# Altium PCB canDrive_hw_board2_v2.PcbDoc
Units mm, origin at the board's own origin, x right, y up, seen from the top; angles counter-clockwise.
Board outline 42.4 x 20.43 mm, 2 copper layers (Top Layer, Bottom Layer), stack 1.571 mm thick; 19 components, 24 nets, 97 pads, 33 vias.
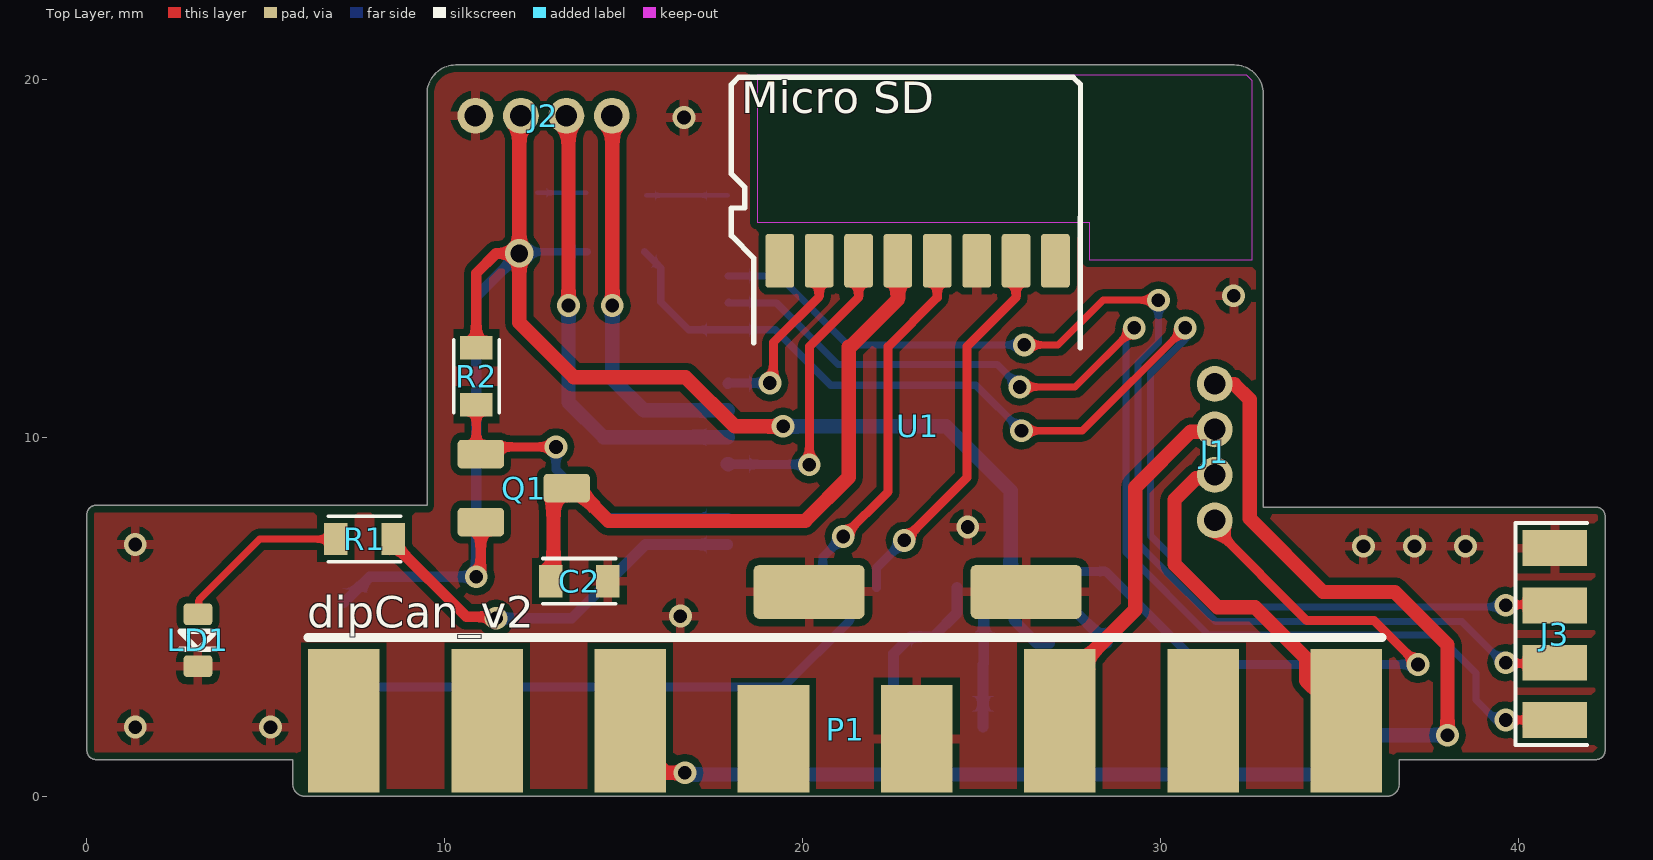
[diagram p0: Top Layer view]
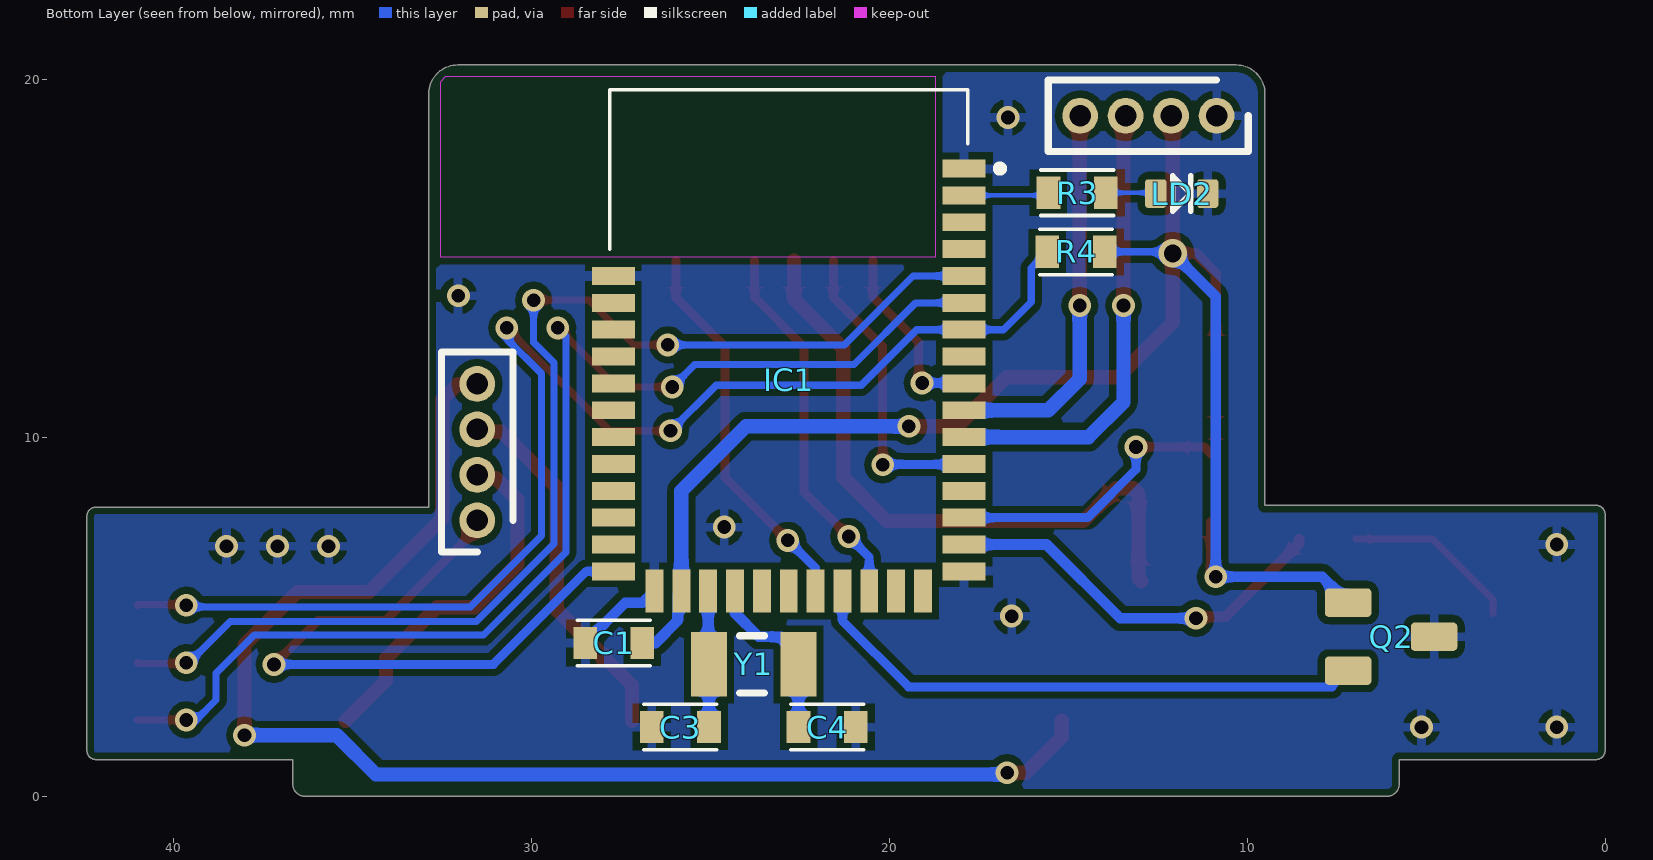
[diagram p1: Bottom Layer view, seen from below]
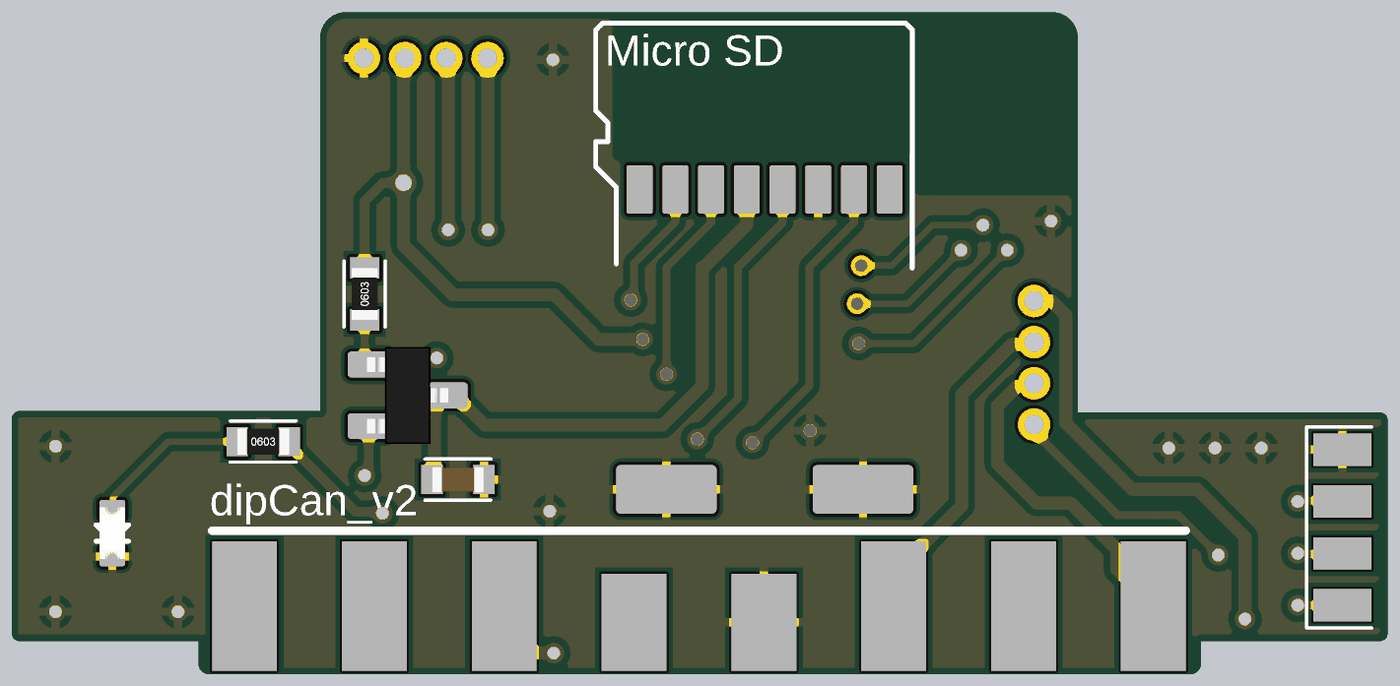
[diagram p2: 3D render of the assembled board from above, using the file's embedded part models]
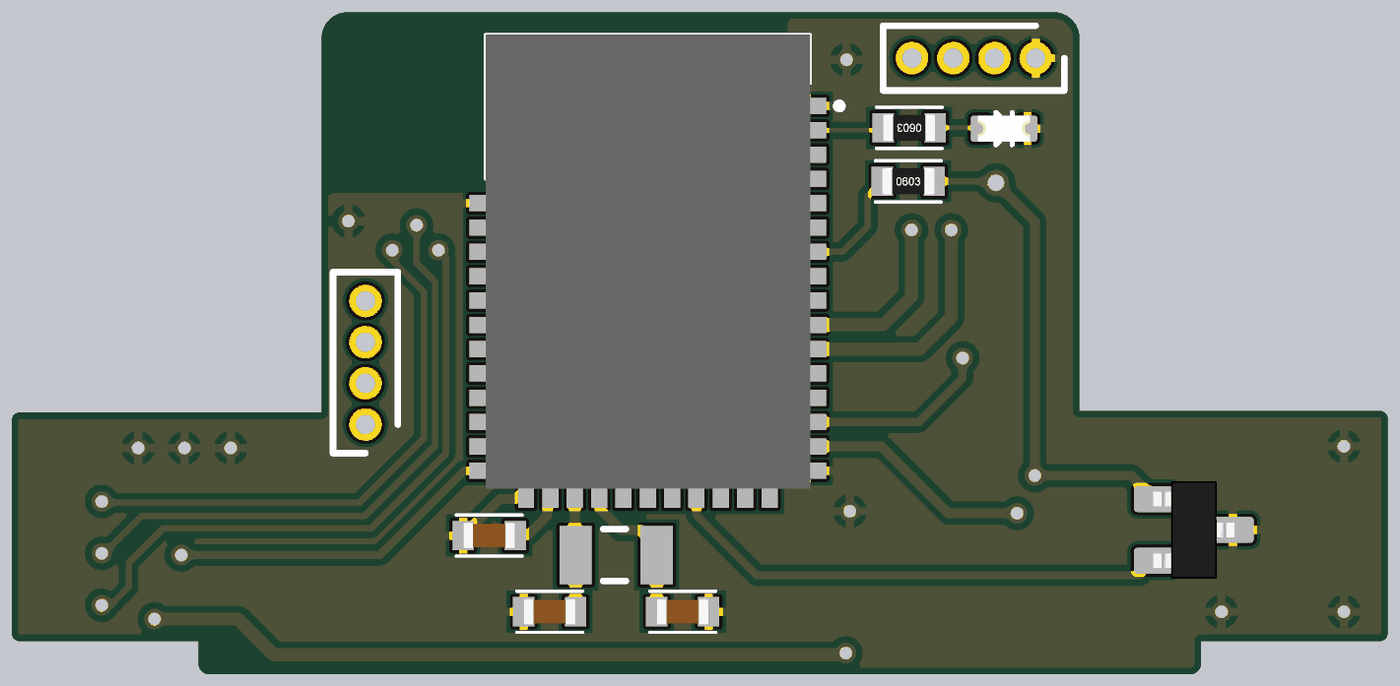
[diagram p3: 3D render of the assembled board from below, using the file's embedded part models]

## Layer stack, top to bottom
Top Solder: solder mask 0.0102, Solder Resist, Dk 3.5
Top Layer: signal copper 0.0356
Dielectric 1: dielectric 1.5, FR-4, Dk 4.8
Bottom Layer: signal copper 0.0356
Bottom Solder: solder mask 0.0102, Solder Resist, Dk 3.5

## Board outline
0.275,1.019 5.775,1.019 5.775,0.335 ccw(c6.116,0.335) 6.116,-0.006 36.334,-0.006 ccw(c36.334,0.335) 36.675,0.335 36.675,1.019 42.175,1.019 ccw(c42.175,1.269) 42.425,1.269 42.425,7.819 ccw(c42.175,7.819) 42.175,8.069 32.875,8.069 32.875,19.619 ccw(c32.075,19.619) 32.075,20.419 10.325,20.419 ccw(c10.325,19.619) 9.525,19.619 9.525,8.119 0.275,8.119 ccw(c0.275,7.869) 0.025,7.869 0.025,1.269 ccw(c0.275,1.269)

## Design rules (kind name [scope] priority, off if disabled: settings)
BoardOutlineClearance [All] p1: gap=0.2 ignorepadtopadclearanceinfootprint=FALSE except(0.4: Arc-SplitBarrior Arc-SplitContinuation Track-SplitBarrior Track-SplitContinuation SMDPad-SplitBarrior SMDPad-SplitContinuation THPad-SplitBarrior THPad-SplitContinuation Via-SplitBarrior Via-SplitContinuation Fill-SplitBarrior Fill-SplitContinuation Poly-SplitBarrior Poly-SplitContinuation Region-SplitBarrior Region-SplitContinuation Text-SplitBarrior Text-SplitContinuation)
Clearance "Clearance Bottom Layer" [OnLayer('Bottom Layer')] p1: gap=0.2 ignorepadtopadclearanceinfootprint=FALSE except(0: Arc-Hole Track-Hole SMDPad-Hole THPad-Hole Via-Hole Fill-Hole Poly-Hole Region-Hole Text-Hole)
Clearance "Clearance Top Layer" [OnLayer('Top Layer')] p2: gap=0.2 ignorepadtopadclearanceinfootprint=FALSE except(0: Arc-Hole Track-Hole SMDPad-Hole THPad-Hole Via-Hole Fill-Hole Poly-Hole Region-Hole Text-Hole)
Clearance [All] p3: gap=0.2 ignorepadtopadclearanceinfootprint=FALSE except(0: Arc-Hole Track-Hole SMDPad-Hole THPad-Hole Via-Hole Fill-Hole Poly-Hole Region-Hole Text-Hole; 0.089: Arc-Arc Arc-Track Arc-SMDPad Track-Track Track-SMDPad SMDPad-SMDPad; 0.127: Arc-Via Track-Via SMDPad-Via THPad-Via Via-Via; 0.254: Arc-Text Track-Text SMDPad-Text THPad-Text Via-Text Fill-Text Poly-Text Region-Text Text-Text)
DiffPairsRouting [All] p1: maxlimit=0.254 minlimit=0.254 mostfreqgap=0.254 toplayer_minwidth=0.381 toplayer_maxwidth=0.381 toplayer_prefwidth=0.381 bottomlayer_minwidth=0.381 bottomlayer_maxwidth=0.381 bottomlayer_prefwidth=0.381 substack1={F337F8C9-7527-4498-9982-460C3D81D1A1} toplayer_{f337f8c9-7527-4498-9982-460c3d81d1a1}_minwidth=0.381 toplayer_{f337f8c9-7527-4498-9982-460c3d81d1a1}_maxwidth=0.381 toplayer_{f337f8c9-7527-4498-9982-460c3d81d1a1}_prefwidth=0.381 bottomlayer_{f337f8c9-7527-4498-9982-460c3d81d1a1}_minwidth=0.381 bottomlayer_{f337f8c9-7527-4498-9982-460c3d81d1a1}_maxwidth=0.381 bottomlayer_{f337f8c9-7527-4498-9982-460c3d81d1a1}_prefwidth=0.381 maxuncoupledlength=12.7
HoleSize [All] p1: absolutevalues=TRUE maxlimit=6.3 minlimit=0.2 maxpercent=80.000 minpercent=20.000
MinimumAnnularRing [All] p1: minimumring=0.076
MinimumSolderMaskSliver [All] p1: minsoldermaskwidth=0.1
PolygonConnect [All] p1: connectstyle=Relief reliefconductorwidth=0.254 reliefentries=4 polygonreliefangle="90 Angle" airgapwidth=0.2
RoutingCorners [All] p1: cornerstyle=Round minsetback=2.54 maxsetback=2.54
RoutingVias [All] p1: holewidth=0.5 width=1 viastyle="Through Hole" minholewidth=0.2 minwidth=0.45 maxholewidth=1 maxwidth=2
SilkToSilkClearance [All] p1: silktosilkclearance=0.1
SilkToSolderMaskClearance [IsPad] p1: minsilkscreentomaskgap=0.1 clearancetoexposedcopper=TRUE
SolderMaskExpansion [All] p1: expansion=0.102 istentingtop=FALSE
Width [All] p1: maxlimit=2.54 minlimit=0.089 preferedwidth=0.381 substack1={F337F8C9-7527-4498-9982-460C3D81D1A1}
24 further rules are at their usual default settings.

## Components (designator, comment, footprint, x,y, rotation, side; value= is the part's Value field where it differs from the comment)
C1 "Capacitor" C0603 27.712,4.275 r180 bottom
C2 "Capacitor" C0603 13.775,6 r180 top
C3 "Capacitor" C0603 25.85,1.925 r180 bottom
C4 "Capacitor" C0603 21.75,1.925 r0 bottom
IC1 "453-00005" 45300005 22.825,12.725 r180 bottom
J1 "CON_1x4" 127MM_HEADER_4PIN 31.525,7.7 r90 top locked
J2 "CON_1x4" 127MM_HEADER_4PIN 10.875,19 r0 top locked
J3 "CON_1x4" RIBBON4PIN 41.025,4.525 r90 top
LD1 "LED" LED_0603 3.125,4.35 r180 top
LD2 "LED" LED_0603 11.85,16.825 r270 bottom
P1 "OBD_connector1-8" OBD1-8 6.2,0.1 r0 top locked
Q1 "MOFFET_pCH" SOT-23 12.225,8.6 r270 top
Q2 "Temp_sensor" SOT-23 6,4.45 r270 bottom
R1 "Resistor" R0603 7.775,7.175 r0 top
R2 "Resistor" R0603 10.9,11.725 r90 top
R3 "Resistor" R0603 14.77,16.85 r0 bottom
R4 "Resistor" R0603 14.8,15.2 r180 bottom
U1 "MicroSD Molex 105162-0001" MICRO_USB_BIG 27.075,14.95 r180 top
Y1 "9HT10-32.768KDZF-T" TXC-9HT10_V 23.8,3.675 r180 bottom

## Footprints (in the part's own frame and the unit in brackets; to place one, negate y for a bottom-side part, rotate by r counter-clockwise, add the part's x,y. Pads: shape width x height; smd on the part's side, far side on the other; paste and mask are expansions set on the pad)
127MM_HEADER_4PIN [mm]
  round 1 hole 0.6: 1(0,0) 2(1.27,0) 3(2.54,0) 4(3.81,0)
45300005 [mm]
  rect 1.2x0.5 smd: 1(4.9,4.8) 2(4.9,4.05) 3(4.9,3.3) 4(4.9,2.55) 5(4.9,1.8) 6(4.9,1.05) 7(4.9,0.3) 8(4.9,-0.45) 9(4.9,-1.2) 10(4.9,-1.95) 11(4.9,-2.7) 12(4.9,-3.45) 13(4.9,-4.2) 14(4.9,-4.95) 15(4.9,-5.7) 16(4.9,-6.45) 28(-4.9,-6.45) 29(-4.9,-5.7) 30(-4.9,-4.95) 31(-4.9,-4.2) 32(-4.9,-3.45) 33(-4.9,-2.7) 34(-4.9,-1.95) 35(-4.9,-1.2) 36(-4.9,-0.45) 37(-4.9,0.3) 38(-4.9,1.05) 39(-4.9,1.8)
  rect 0.5x1.2 smd: 17(3.75,-7) 18(3,-7) 19(2.25,-7) 20(1.5,-7) 21(0.75,-7) 22(0,-7) 23(-0.75,-7) 24(-1.5,-7) 25(-2.25,-7) 26(-3,-7) 27(-3.75,-7)
  silkscreen extent -5,2.55 6,7, body extent -5,-7 5,7, height 2.3
C0603 [mm] "Imperial 0603"
  rect 0.66x0.9 smd: 0(-0.8,0) 1(0.8,0)
  silkscreen extent -1.02,-0.64 1.02,0.64, body extent -0.8,-0.4 0.8,0.4, height 0.78
LED_0603 [mm]
  rrect30% 0.8x0.6 smd: A(0,-0.725) C(0,0.725)
  silkscreen extent -0.5,-0.25 0.5,0.25, body extent -0.4,-0.8 0.4,0.8, height 0.7
MICRO_USB_BIG [mm] "MicroSD socket"
  rrect20% 3.1x1.5 smd: 0(0.82,9.25) 0(6.88,9.25)
  rrect20% 0.8x1.5 smd: 1(7.7,0) 2(6.6,0) 3(5.5,0) 4(4.4,0) 5(3.3,0) 6(2.2,0) 7(1.1,0) 8(0,0)
  body extent -1.15,-1.5 9.15,9.43, height 1.8
OBD1-8 [mm]
  rect 2x4 smd mask+0.07: 1(29,2) 2(25,2) 3(21,2) 6(9,2) 7(5,2) 8(1,2)
  rect 2x3 smd mask+0.07: 4(17,1.5) 5(13,1.5)
  silkscreen extent 0,4.33 30,4.33
R0603 [mm] "Imperial 0603"
  rect 0.66x0.9 smd: 0(-0.8,0) 1(0.8,0)
  silkscreen extent -1.02,-0.64 1.02,0.64, body extent -0.8,-0.4 0.8,0.4, height 0.44
RIBBON4PIN [mm]
  rect 1x1.8 smd paste+0 mask+0.07: 1(-2.4,0) 2(-0.8,0) 3(0.8,0) 4(2.4,0)
  silkscreen extent -3.1,-0.9 3.1,1.1
SOT-23 [mm] "SOT-23"
  rrect30% 0.8x1.3 smd: 1(0,1.2) 2(-0.95,-1.2) 3(0.95,-1.2)
  body extent -1.5,-1.25 1.5,1.25, height 1.09
TXC-9HT10_V [mm] "SMD, 2-Leads, Body 3.2x1.5mm"
  rect 1x1.8 smd: 1(-1.25,0) 2(1.25,0)
  silkscreen extent -0.4,-0.8 0.3,0.8, body extent -1.6,-0.75 1.6,0.75, height 0.85

## Part data
IC1: "Integrated Circuit"
J1 J2 J3: "1x4 connector"
P1: library part OBD1-8
Q1: "MOSFET P_CH"
Q2: "Temperature sensor"
Y1: "Tuning Fork, 32.768 KHz, -40 to 85 degC, 2-Pin SMD, RoHS, Tape and Reel"

## Via types
v1: diameter 0.635, hole 0.381, Top Layer to Bottom Layer, tented both sides, 30 vias
v2: diameter 0.635, hole 0.381, Top Layer to Bottom Layer, 2 vias
v3: diameter 0.8, hole 0.5, Top Layer to Bottom Layer, tented both sides, 1 vias

## Nets (pads, with @x,y where several pads share a name; then routed paths per layer and width w, separated by ;. In a path a pad name is that pad's centre, name@x,y a point inside that pad or via, vN(x,y) a via of type N, cw(c..) or ccw(c..) an arc to the next point about the centre after c; other vN are vias at no path point)
+3V3: C1.1 IC1.26 J2.2 Q1.3 Q2.2 R2.1 R4.1 | length 46.7
  Top Layer w0.3: v1(10.9,6.125) 11.025,6.25 Q1.3 ; R2.1 10.9,14.603 11.452,15.155 v3(12.1,15.155) ; J2.2@12.1,18.955 J2.2
  Top Layer w0.4: J2.2@12.1,18.955 v3(12.1,15.155) 12.1,13.225 13.625,11.7 16.745,11.7 18.12,10.325 v1(19.468,10.325)
  Bottom Layer w0.2: v3@12.145,15.2 R4.1
  Bottom Layer w0.3: Q2.2 7.925,6.125 v1(10.9,6.125) 10.9,13.955 v3(12.1,15.155) ; IC1.26 25.921,5.629 25.921,4.9 26.546,4.275 C1.1
  Bottom Layer w0.4: v1(19.468,10.325) 24.02,10.325 25.825,8.52 IC1.26@25.825,5.825
COMM_GPIO: IC1.28 J1.1 | length 18.1
  Top Layer w0.25: J1.1 31.525,7.475 34.1,4.9 35.975,4.9 v1(37.2,3.675)
  Bottom Layer w0.25: IC1.28 28.475,6.275 31.075,3.675 v1(37.2,3.675)
  Bottom Layer w0.4: J1.1@31.487,7.738 J1.1
COMM_RX: IC1.10 J2.4 | length 10.9
  Top Layer w0.4: J2.4 14.7,18.985 v1(14.7,13.7)
  Bottom Layer w0.4: v1(14.7,13.7) 14.7,11.65 15.575,10.775 IC1.10
COMM_TX: IC1.11 J2.3 | length 12.7
  Top Layer w0.4: v1(13.475,13.7) J2.3@13.475,18.94
  Bottom Layer w0.4: v1@13.475,13.575 13.475,11 14.45,10.025 IC1.11
GND: C1.0 C2.0 C3.0 C4.0 IC1.1 IC1.16 IC1.27 IC1.39 J2.1 J3.4 LD1.C LD2.C P1.4 Q2.1 U1.0 U1.6 | length 2.5
  Bottom Layer w0.3: IC1.27 26.9,5.4 27.388,5.4 C1.0
  other v1: 1.375,1.925 5.15,1.925 16.6,5.025 35.677,6.975 37.102,6.975 38.527,6.975 1.377,7.025 24.625,7.512 32.05,13.975 16.7,18.95
HS_CAN_H: J1.4 P1.6 | length 38.3
  Top Layer w0.4: P1.6 15.2,1.65 16.2,0.65 v1(16.725,0.65) ; J1.4 32.065,11.51 32.5,11.075 32.5,7.75 34.55,5.7 36.55,5.7 38.025,4.225 v1(38.025,1.7)
  Bottom Layer w0.4: v1(16.725,0.65) 16.775,0.6 34.35,0.6 35.45,1.7 v1(38.025,1.7) ; J1.4 J1.4@31.64,11.395
LED1: IC1.15 R1.1 | length 11.2
  Top Layer w0.3: R1.1 8.575,7.055 10.623,5.007 11.405,5.007 v1(11.45,4.962)
  Bottom Layer w0.3: v1(11.45,4.962) 13.563,4.962 15.625,7.025 IC1.15
LED2: IC1.2 R3.1 | length 2.3
  Bottom Layer w0.13: R3.1@15.645,16.775 IC1.2
LS_CAN_H: J1.2 P1.1 | length 10.2
  Top Layer w0.4: J1.2 31.429,8.874 30.999,8.874 30.4,8.275 30.4,6.475 31.6,5.275 32.65,5.275 34.075,3.85 34.075,3.225 P1.1
MISO: IC1.21 U1.7 | length 10.7
  Top Layer w0.25: v1(22.85,7.139) 24.6,8.889 24.6,12.55 25.975,13.925 U1.7
  Bottom Layer w0.25: IC1.21@22.075,5.825 22.075,6.364 v1(22.85,7.139)
MOSI: IC1.12 U1.3 | length 8.6
  Top Layer w0.25: v1(20.2,9.25) 20.2,12.55 21.575,13.925 U1.3
  Bottom Layer w0.25: IC1.12@17.937,9.263 v1@20.187,9.263
  Bottom Layer w0.4: IC1.12 IC1.12@17.937,9.263 ; v1@20.187,9.263 v1(20.2,9.25)
MS_CAN_H: J1.3 P1.3 | length 10.3
  Top Layer w0.4: P1.3 27.2,3.1 29.3,5.2 29.3,8.625 30.85,10.175 31.46,10.175 J1.3
NetC2_1: C2.1 Q1.1 U1.4 | length 18.3
  Top Layer w0.4: C2.1 13.055,6.08 13.055,8.45 13.205,8.6 Q1.1 13.675,8.6 14.592,7.683 20.083,7.683 21.3,8.9 21.3,12.55 21.35,12.55 22.675,13.875 U1.4
NetLD1_A: LD1.A R1.0 | length 4.9
  Top Layer w0.2: LD1.A@3.15,5.1 3.15,5.475 4.85,7.175 R1.0
NetLD2_A: LD2.A R3.0 | length 1.4
  Bottom Layer w0.13: LD2.A@12.6,16.85 R3.0
NRF_RST: IC1.7 J3.3 R4.0 | length 37.3
  Top Layer w0.2: v1(26.125,10.2) 27.825,10.2 v1(30.7,13.075) ; v1@39.575,5.35 41,5.35 J3.3
  Bottom Layer w0.2: R4.0 16.05,14.75 16.05,13.8 16.825,13.025 IC1.7 19.25,13.025 20.8,11.475 24.85,11.475 v1(26.125,10.2) ; v1(30.7,13.075) 30.7,12.768 29.725,11.793 29.725,7.275 31.717,5.283 39.358,5.283 v1@39.525,5.45
  other v1: 39.65,5.325
NRF_SWCLK: IC1.6 J3.1 | length 33.8
  Top Layer w0.2: v2(26.075,11.425) 27.625,11.425 v1(29.275,13.075) ; v1@39.625,2.05 39.7,2.125 J3.1
  Bottom Layer w0.2: IC1.6@17.95,13.8 IC1.6 19.275,13.775 21,12.05 25.45,12.05 v2(26.075,11.425) ; v1(29.275,13.075) 29.05,12.85 29.05,6.8 31.35,4.5 37.75,4.5 38.82,3.43 38.82,2.681 39.375,2.125 v1(39.65,2.125)
NRF_SWDIO: IC1.5 J3.2 | length 33.4
  Top Layer w0.2: v2(26.2,12.6) 27.15,12.6 28.4,13.85 v1(29.95,13.85) ; v1@39.65,3.7 41,3.7 J3.2
  Bottom Layer w0.2: IC1.5 19.35,14.525 21.275,12.6 v2(26.2,12.6) ; v1(29.95,13.85) 29.95,12.675 29.377,12.102 29.377,7.048 31.55,4.875 38.425,4.875 39.575,3.725 v1(39.65,3.725)
SCLK: IC1.19 U1.5 | length 10.5
  Top Layer w0.25: v1(21.15,7.25) 22.4,8.5 22.4,12.55 23.775,13.925 U1.5
  Bottom Layer w0.25: IC1.19@20.575,5.825 20.575,6.675 v1(21.15,7.25)
SD_CS: IC1.9 U1.2 | length 5.2
  Top Layer w0.25: v1@19.2,11.638 19.2,12.671 20.475,13.946 U1.2
  Top Layer w0.3: v1(19.1,11.537) v1@19.2,11.638
  Bottom Layer w0.25: IC1.9@17.937,11.537 v1(19.1,11.537)
  Bottom Layer w0.3: IC1.9 IC1.9@17.937,11.537
SD_EN: IC1.14 Q1.2 R2.0 | length 9.6
  Top Layer w0.25: R2.0 10.9,9.675 Q1.2 11.225,9.75 v1(13.125,9.75)
  Bottom Layer w0.25: v1(13.125,9.75) 13.125,9.125 14.475,7.775 IC1.14
TEMP: IC1.20 Q2.3 | length 16
  Bottom Layer w0.2: Q2.3 7.65,3.05
  Bottom Layer w0.25: 7.65,3.05 19.475,3.05 21.325,4.9 IC1.20@21.325,5.825
XL1: C3.1 IC1.25 Y1.1 | length 3.9
  Bottom Layer w0.3: C3.1 Y1.1 25.075,3.7 IC1.25@25.075,5.825
XL2: C4.1 IC1.24 Y1.2 | length 5
  Bottom Layer w0.3: C4.1 Y1.2 22.55,3.975 23.025,4.45 23.663,4.45 24.325,5.112 IC1.24@24.325,5.825
pads on no net: IC1.3 IC1.4 IC1.8 IC1.13 IC1.17 IC1.18 IC1.22 IC1.23 IC1.29 IC1.30 IC1.31 IC1.32 IC1.33 IC1.34 IC1.35 IC1.36 IC1.37 IC1.38 P1.2 P1.5 P1.7 P1.8 U1.1 U1.8

## Polygon pours and split planes (outlines as drawn)
GND on Top Layer "Top Layer-No Net" (solid, pour order 0): 0.275,1.019 5.775,1.019 5.775,0.335 ccw(c6.116,0.335) 6.116,-0.006 36.334,-0.006 ccw(c36.334,0.335) 36.675,0.335 36.675,1.019 42.175,1.019 ccw(c42.175,1.269) 42.425,1.269 42.425,7.819 ccw(c42.175,7.819) 42.175,8.069 32.875,8.069 32.875,19.619 ccw(c32.075,19.619) 32.075,20.419 10.325,20.419 ccw(c10.325,19.619) 9.525,19.619 9.525,8.119 0.275,8.119 ccw(c0.275,7.869) 0.025,7.869 0.025,1.269 ccw(c0.275,1.269)
GND on Bottom Layer "Top Layer-No Net1" (solid, pour order 1): 0.275,1.019 5.775,1.019 5.775,0.335 ccw(c6.116,0.335) 6.116,-0.006 36.334,-0.006 ccw(c36.334,0.335) 36.675,0.335 36.675,1.019 42.175,1.019 ccw(c42.175,1.269) 42.425,1.269 42.425,7.819 ccw(c42.175,7.819) 42.175,8.069 32.875,8.069 32.875,19.619 ccw(c32.075,19.619) 32.075,20.419 10.325,20.419 ccw(c10.325,19.619) 9.525,19.619 9.525,8.119 0.275,8.119 ccw(c0.275,7.869) 0.025,7.869 0.025,1.269 ccw(c0.275,1.269)

## Keep-outs
Top Layer:
  region: 18.742,16.025 28.015,16.025 28.015,14.975 32.565,14.975 32.565,19.975 32.415,20.125 18.742,20.125
Bottom Layer:
  region: 18.727,15.043 32.55,15.043 32.55,19.95 32.4,20.1 18.727,20.1

## Silkscreen, mask and mechanical layers (free items; w line width, h text height)
Top Overlay:
  lines w0.15: 18.022,19.86 18.022,17.378 18.394,17.006 18.394,16.422 18.022,16.422 18.022,15.65 18.653,15.019 18.653,12.656 ; 18.022,19.872 18.225,20.075 27.569,20.075 27.772,19.872 ; 27.772,12.525 27.775,19.875
  text "Micro SD" at 18.3,18.775 h1.52
  text "dipCan_v2" at 6.175,4.4 h1.52
Mechanical 1:
  lines w0.1: 0.025,7.844 0.025,1.269 ccw(c0.275,1.269) 0.275,1.019 5.775,1.019 5.775,0.335 ccw(c6.116,0.335) 6.116,-0.006 36.334,-0.006 ccw(c36.334,0.335) 36.675,0.335 36.675,1.019 42.175,1.019 ccw(c42.175,1.269) 42.425,1.269 42.425,7.819 ccw(c42.175,7.819) 42.175,8.069 32.875,8.069 32.875,19.619 ccw(c32.075,19.619) 32.075,20.419 10.325,20.419 ccw(c10.325,19.619) 9.525,19.619 9.525,8.119 9.425,8.119 0.3,8.119 ; 0.025,7.869 cw(c0.275,7.869) 0.275,8.119